# Altium PCB PCB_URC-VPN-New-Project_5_2025-07-22.pcbdoc
Units mm, origin at the board's own origin, x right, y up, seen from the top; angles counter-clockwise.
Board outline 95.38 x 82.5 mm, 2 copper layers (Top Layer, Bottom Layer); 26 components, 18 nets, 72 pads, 14 vias.
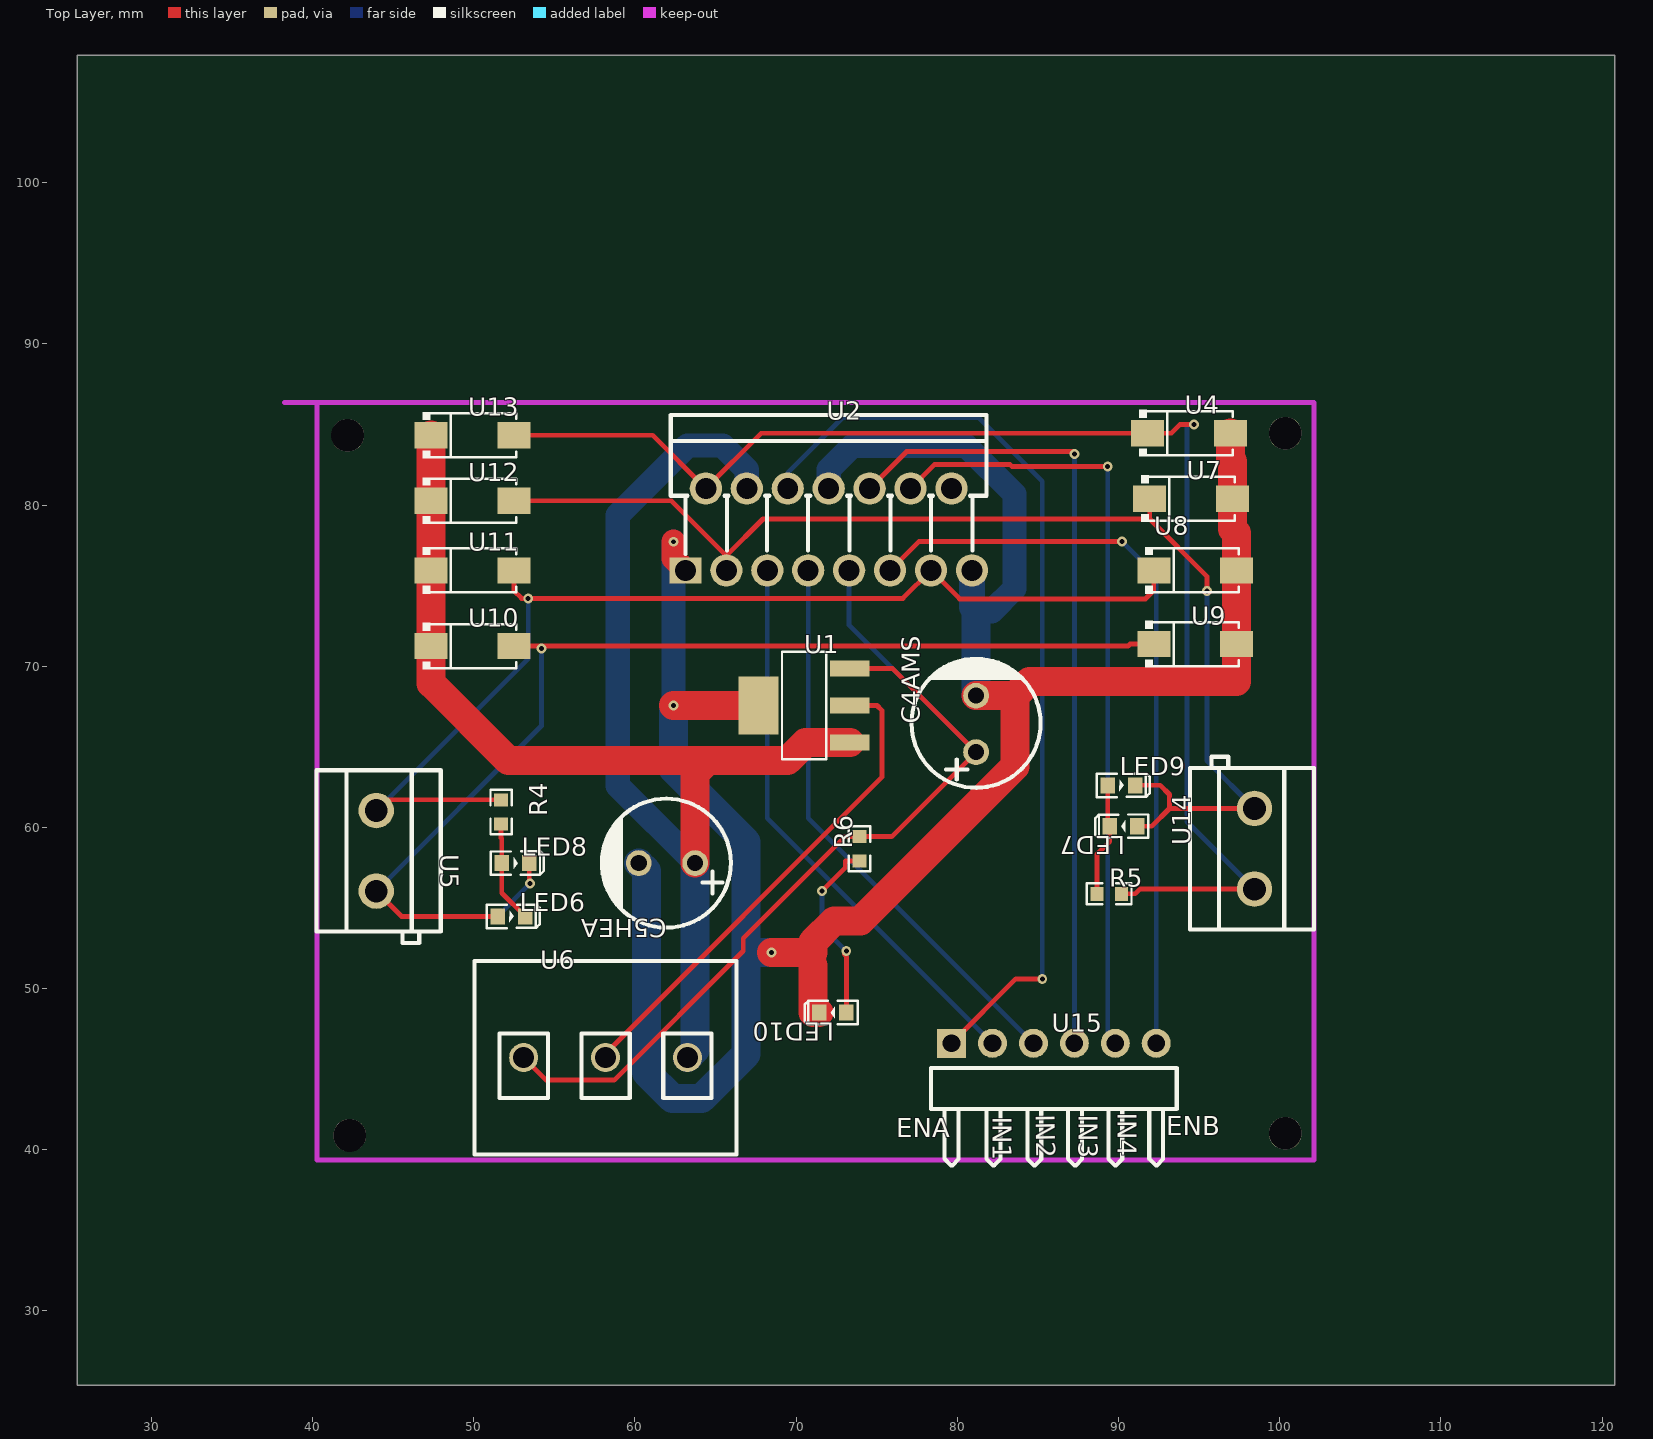
[diagram p0: Top Layer view]
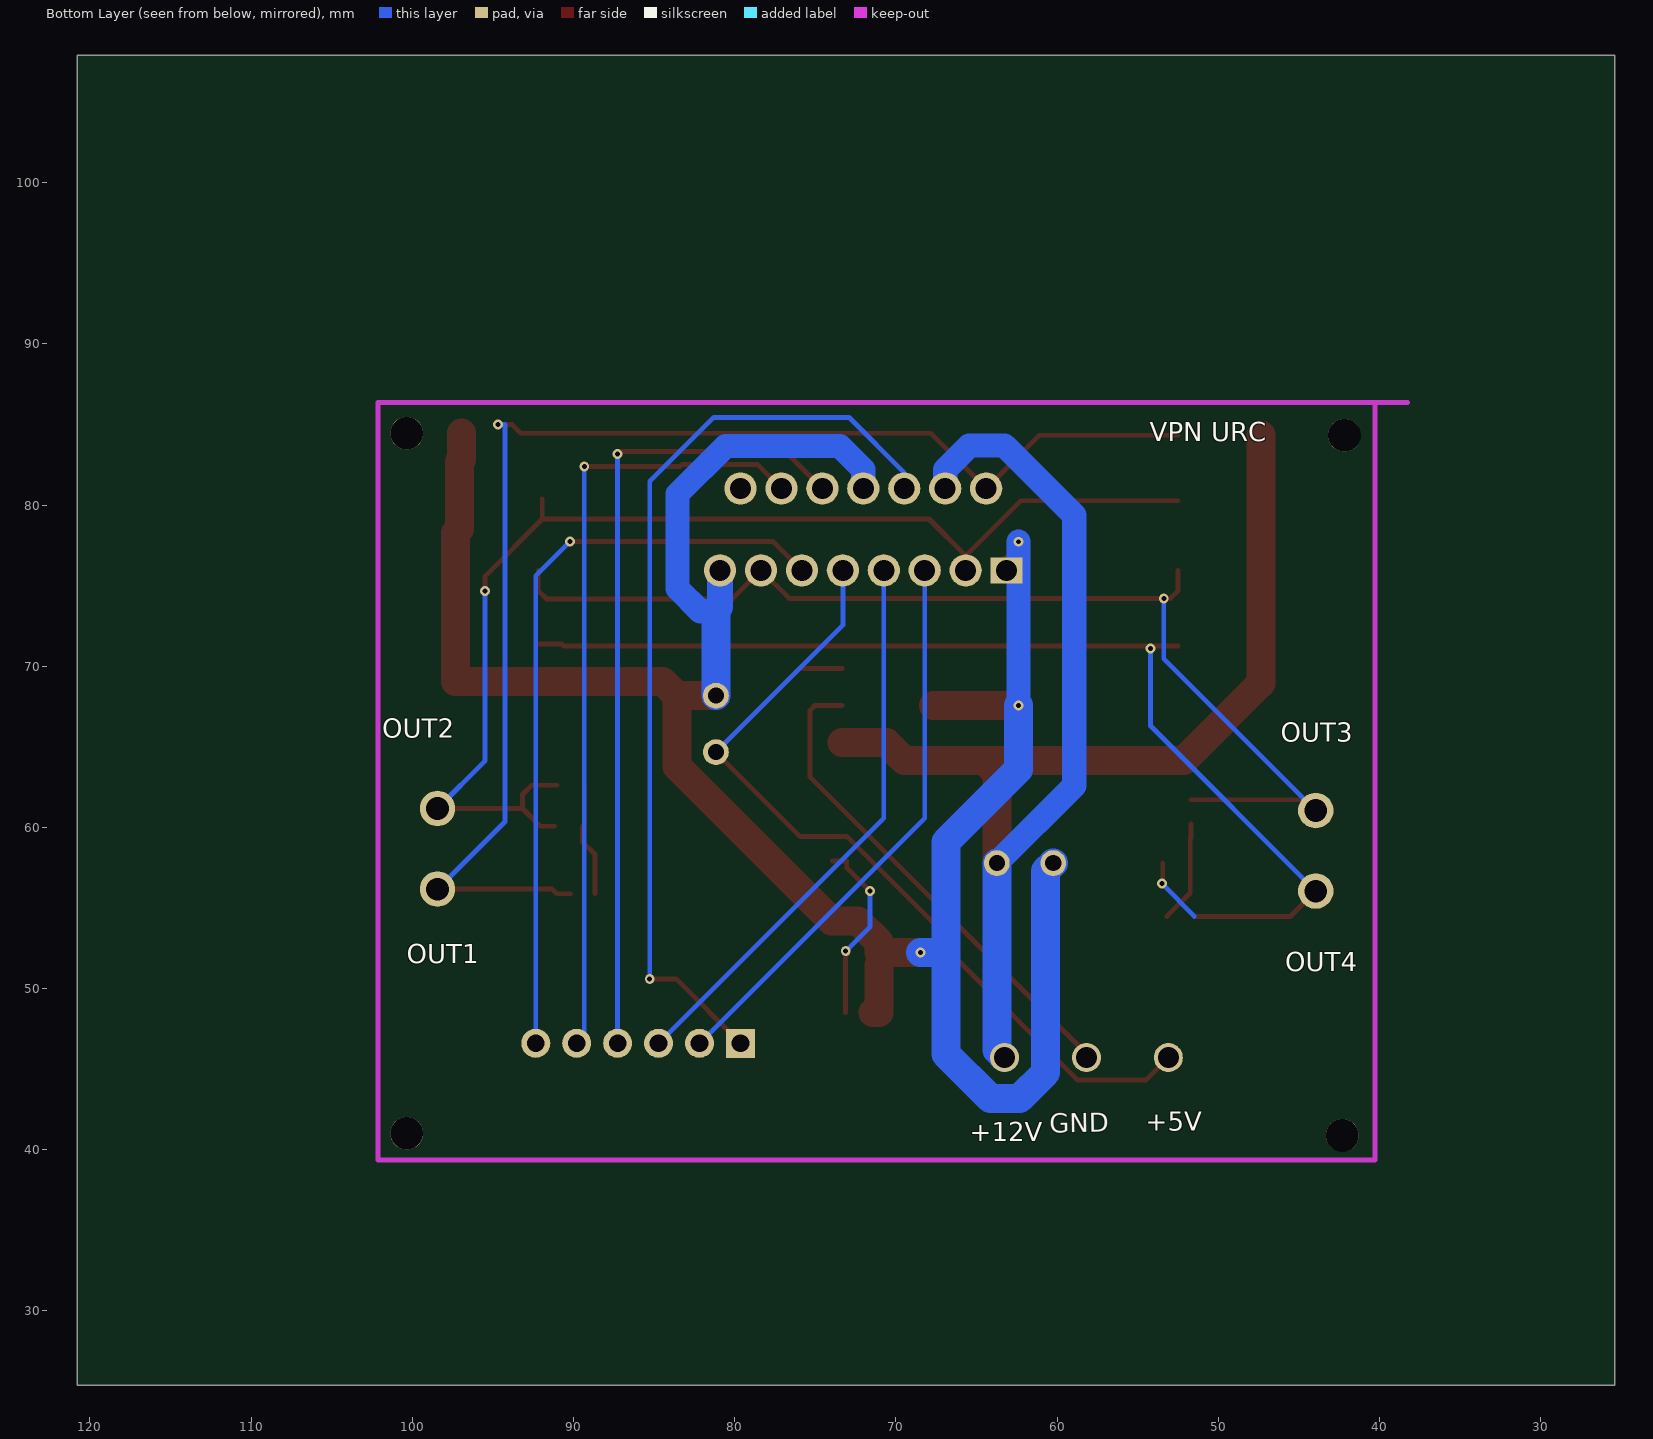
[diagram p1: Bottom Layer view, seen from below]

## Layer stack, top to bottom
Top Layer: signal copper (thickness not stored)
Dielectric: dielectric 0.32, FR-4, Dk 4.8
Bottom Layer: signal copper (thickness not stored)

## Board outline
120.781,25.4 25.4,25.4 25.4,107.902 120.781,107.902

## Components (designator, comment, footprint, x,y, rotation, side; value= is the part's Value field where it differs from the comment)
C4AMS "220uF" CAP-TH_BD8.0-P3.50-D0.6-FD 81.161,66.421 r90 top
C5HEA "220uF" CAP-TH_BD8.0-P3.50-D0.6-FD 61.984,57.785 r180 top
LED6 "LED-0603_B" LED0603_BLUE 52.332,54.483 r0 top
LED7 "LED-0603_B" LED0603_BLUE 90.305,60.071 r180 top
LED8 "LED-0603_G" LED0603_GREEN 52.586,57.785 r0 top
LED9 "LED-0603_G" LED0603_GREEN 90.178,62.611 r0 top
LED10 "LED-0603_R" LED0603_RED 72.271,48.514 r180 top
R4 "1k" R0603 51.697,60.96 r90 top
R5 "1k" R0603 89.416,55.88 r0 top
R6 "1k" R0603 73.922,58.674 r90 top
U1 "LM78M05MP/TR" SOT-223-4_L6.5-W3.5-P2.30-LS7.0-BR 70.493,67.564 r0 top
U2 "L298N(MS)" MULTIWATT-15_L19.6-W5.0-P1.27-L 72.017,78.486 r0 top
U4 "1N4007 M7_C20754788" SMA_L4.4-W2.8-LS5.4-RD 94.369,84.455 r0 top
U5 "KF301-5.0-2P" CONN-TH_P5.00_KF301-5.0-2P 43.95,58.547 r270 top
U6 "1869224" CONN-TH_3P-P5.08_1869224 58.174,45.72 r0 top
U7 "1N4007 M7_C20754788" SMA_L4.4-W2.8-LS5.4-RD 94.496,80.391 r0 top
U8 "1N4007 M7_C20754788" SMA_L4.4-W2.8-LS5.4-RD 94.75,75.946 r0 top
U9 "1N4007 M7_C20754788" SMA_L4.4-W2.8-LS5.4-RD 94.75,71.374 r0 top
U10 "1N4007 M7_C20754788" SMA_L4.4-W2.8-LS5.4-RD 49.919,71.247 r0 top
U11 "1N4007 M7_C20754788" SMA_L4.4-W2.8-LS5.4-RD 49.919,75.946 r0 top
U12 "1N4007 M7_C20754788" SMA_L4.4-W2.8-LS5.4-RD 49.919,80.264 r0 top
U13 "1N4007 M7_C20754788" SMA_L4.4-W2.8-LS5.4-RD 49.919,84.328 r0 top
U14 "KF301-5.0-2P" CONN-TH_P5.00_KF301-5.0-2P 98.433,58.674 r90 top
U15 "1110-1X6(L11.5)PA6T" HDR-TH_6P-P2.54-H-M-W8.0 85.987,46.609 r0 top
? "" ? 71.191,89.866 r0 top
? "" ? 105.01,62.738 r0 top

## Footprints (in the part's own frame and the unit in brackets; to place one, negate y for a bottom-side part, rotate by r counter-clockwise, add the part's x,y. Pads: shape width x height; smd on the part's side, far side on the other; paste and mask are expansions set on the pad)
CAP-TH_BD8.0-P3.50-D0.6-FD [mm]
  round 1.6 hole 1 paste+0 mask+0.051: 1(-1.75,0) 2(1.75,0)
  silkscreen extent -3.96,-4 4.04,4
CONN-TH_3P-P5.08_1869224 [mm]
  round 1.8 hole 1.3 paste+0 mask+0.05: 1(-5.08,0) 2(0,0) 3(5.08,0)
  silkscreen extent -8.13,-6 8.12,6
CONN-TH_P5.00_KF301-5.0-2P [mm]
  round 2.2 hole 1.4 paste+0 mask+0.051: 1(-2.5,0) 2(2.5,0)
  silkscreen extent -5,-3.7 5.71,4
HDR-TH_6P-P2.54-H-M-W8.0 [mm]
  rect 1.8x1.8 hole 1.1 paste+0 mask+0.051: 1(-6.35,0)
  round 1.8 hole 1.1 paste+0 mask+0.051: 2(-3.81,0) 3(-1.27,0) 4(1.27,0) 5(3.81,0) 6(6.35,0)
  silkscreen extent -7.62,-7.57 7.62,-1.53
LED0603_BLUE [mm]
  rect 0.9x1 smd paste+0 mask+0.051: 1(-0.85,0) 2(0.85,0)
  silkscreen extent -1.54,-0.73 1.75,0.73
LED0603_GREEN [mm]
  rect 0.9x1 smd paste+0 mask+0.051: 1(-0.85,0) 2(0.85,0)
  silkscreen extent -1.54,-0.73 1.75,0.73
LED0603_RED [mm]
  rect 0.9x1 smd paste+0 mask+0.051: 1(-0.85,0) 2(0.85,0)
  silkscreen extent -1.54,-0.73 1.75,0.73
MULTIWATT-15_L19.6-W5.0-P1.27-L [mm]
  rect 2x1.6 hole 1.3 paste+0 mask+0.051: 1(-8.89,-2.54)
  round 2 hole 1.3 paste+0 mask+0.051: 2(-7.62,2.54) 3(-6.35,-2.54) 4(-5.08,2.54) 5(-3.81,-2.54) 6(-2.54,2.54) 7(-1.27,-2.54) 8(0,2.54) 9(1.27,-2.54) 10(2.54,2.54) 11(3.81,-2.54) 12(5.08,2.54) 13(6.35,-2.54) 14(7.62,2.54) 15(8.89,-2.54)
  silkscreen extent -9.8,-1.52 9.8,7.09
R0603 [mm]
  rect 0.806x0.864 smd paste-100 mask+0.051: 1(-0.753,0) 2(0.753,0)
  silkscreen extent -1.39,-0.66 1.39,0.66
SMA_L4.4-W2.8-LS5.4-RD [mm]
  rect 2.046x1.62 smd paste+0 mask+0.051: 1(-2.566,0) 2(2.565,0)
  silkscreen extent -3.08,-1.44 2.7,1.44
SOT-223-4_L6.5-W3.5-P2.30-LS7.0-BR [mm]
  rect 2.47x0.98 smd paste+0 mask+0.051: 1(2.835,-2.3) 2(2.835,0) 3(2.835,2.3)
  rect 2.47x3.6 smd paste+0 mask+0.051: 4(-2.835,0)
  silkscreen extent -1.37,-3.33 1.37,3.33
? [mm]

## Free pads (board coordinates)
  round 2.032 hole 2.032 unplated paste+0: ""(42.172,84.328) ""(42.299,40.894) ""(100.338,41.021) ""(100.338,84.455)

## Via types
v1: diameter 0.61, hole 0.305, Top Layer to Bottom Layer, tented both sides, 13 vias
v2: diameter 0.62, hole 0.31, Top Layer to Bottom Layer, tented both sides, 1 vias

## Nets (pads, with @x,y where several pads share a name; then routed paths per layer and width w, separated by ;. In a path a pad name is that pad's centre, name@x,y a point inside that pad or via, vN(x,y) a via of type N, cw(c..) or ccw(c..) an arc to the next point about the centre after c; other vN are vias at no path point)
5V: C4AMS.1 R6.2 U1.3 U2.9 U6.1 | length 62.1
  Top Layer w0.3: U6.1 54.488,44.326 58.712,44.326 66.716,52.332 66.716,53.119 73.025,59.428 R6.2 ; U1.3 75.968,69.864 C4AMS.1 75.917,59.427 R6.2
  Bottom Layer w0.3: U2.9 73.287,72.545 C4AMS.1
12V: C5HEA.1 U1.1 U2.4 U6.3 U10.1 U11.1 U12.1 U13.1 | length 97.9
  Top Layer w1.8: U13.1 U12.1 U11.1 U10.1 47.353,68.937 52.155,64.136 64.496,64.136 ; C5HEA.1 63.734,63.373 64.496,64.136 ; U1.1 70.593,65.264 69.464,64.136 64.496,64.136
  Bottom Layer w1.5: C5HEA.1 58.936,62.583 58.936,79.37 63.249,83.683 65.446,83.683 66.937,82.192 U2.4
  Bottom Layer w1.8: U6.3 63.734,46.2 C5HEA.1
GND: C4AMS.2 C5HEA.2 LED10.2 U1.4 U2.1 U2.8 U2.15 U4.2 U7.2 U8.2 U9.2 | length 155
  Top Layer w1.5: v1(62.385,77.723) 62.385,76.688 U2.1
  Top Layer w1.8: v1(62.385,67.564) U1.4 ; v1(68.465,52.236) 71.043,52.236 71.043,52.888 72.361,54.206 73.991,54.206 83.576,63.79 83.576,68.171 ; 71.044,51.432 71.044,48.514 LED10.2 ; C4AMS.2 83.576,68.171 ; U4.2 96.934,82.828 97.061,82.701 U7.2 97.061,78.51 97.315,78.256 U8.2 U9.2 97.315,69.064 84.469,69.064 83.576,68.171
  Bottom Layer w1.5: v1(62.385,67.564) v1(62.385,77.723) ; U2.8 72.017,82.206 73.477,83.667 80.554,83.667 83.54,80.681 83.54,74.818 82.127,73.406 81.161,73.406
  Bottom Layer w1.6: U2.15 80.907,73.66 81.161,73.406
  Bottom Layer w1.8: C5HEA.2 60.714,57.305 60.714,44.789 62.322,43.181 64.13,43.181 66.896,45.947 66.896,52.236 v1(68.465,52.236) ; v1(62.385,67.564) 62.385,63.607 66.896,59.096 66.896,52.238 ; C4AMS.2 81.161,73.406
LED6_2: LED6.2 LED8.1 R4.1 | length 6.3
  Top Layer w0.3: R4.1 51.697,59.353 51.736,59.314 LED8.1 51.736,55.929 LED6.2
LED7_2: LED7.2 LED9.1 R5.1 | length 7.1
  Top Layer w0.3: R5.1@88.662,55.88 88.662,58.328 89.455,59.121 LED7.2 89.328,60.198 LED9.1
R6_1: LED10.1 R6.1 | length 11.6
  Top Layer w0.3: v1(71.598,56.047) 73.039,57.489 73.039,57.921 R6.1 ; v1(73.109,52.324) 73.109,52.247 72.994,52.132 73.121,52.004 LED10.1
  Bottom Layer w0.3: v1(71.598,56.047) 71.598,53.835 v1(73.109,52.324)
U1_2: U1.2 U6.2 | length 30.8
  Top Layer w0.3: U6.2 58.174,45.974 75.314,63.114 75.314,67.264 75.014,67.564 U1.2
U2_2: R5.2 U2.2 U4.1 U13.2 U14.1 | length 84.6
  Top Layer w0.3: U13.2 61.095,84.328 U2.2 67.826,84.455 U4.1 93.277,84.455 93.821,84.999 v1(94.688,84.999) ; R5.2 91.023,55.88 91.317,56.174 U14.1
  Bottom Layer w0.3: v1@94.686,84.999 94.242,84.999 94.242,60.366 U14.1
U2_3: LED7.1 LED9.2 U2.3 U7.1 U12.2 U14.2 | length 75.6
  Top Layer w0.3: U12.2 62.257,80.264 U2.3@65.667,76.855 ; U2.3 U2.3@65.667,76.855 ; LED9.2 92.591,62.611 93.16,62.042 93.16,61.173 ; LED7.1 92.056,60.071 93.159,61.174 U14.2 ; U7.1 91.93,79.13 ; v1(95.476,74.662) 95.476,75.585 91.93,79.13 ; U2.3@65.667,76.855 67.943,79.13 91.93,79.13
  Bottom Layer w0.3: v1(95.476,74.662) 95.476,64.131 U14.2
U2_5: U2.5 U15.2 | length 35.1
  Bottom Layer w0.3: U2.5 68.207,60.579 U15.2
U2_6: U2.6 U15.1 | length 58
  Top Layer w0.3: U15.1 83.63,50.603 v1(85.269,50.603)
  Bottom Layer w0.3: U2.6 69.477,82.004 72.906,85.433 81.299,85.433 85.269,81.463 v1(85.269,50.603)
U2_7: U2.7 U15.3 | length 35.1
  Bottom Layer w0.3: U2.7 70.747,60.579 U15.3
U2_10: U2.10 U15.4 | length 50.3
  Top Layer w0.3: U2.10 76.843,83.312 87.257,83.312 v1@87.257,83.157
  Bottom Layer w0.3: U15.4 v1(87.257,83.156)
U2_11: U2.11 U15.6 | length 47.1
  Top Layer w0.3: U2.11 77.611,77.73 v1(90.221,77.73)
  Bottom Layer w0.3: v1(90.221,77.73) 92.337,75.614 U15.6
U2_12: U2.12 U15.5 | length 48.9
  Top Layer w0.3: U2.12 78.577,82.507 83.275,82.507 83.383,82.399 v1(89.326,82.399)
  Bottom Layer w0.3: v1(89.326,82.399) 89.326,47.08 U15.5
U2_13: R4.2 U2.13 U5.1 U8.1 U11.2 | length 69.2
  Top Layer w0.3: U5.1 44.616,61.713 R4.2 ; U11.2 52.484,74.685 52.966,74.204 v1(53.376,74.204) 76.624,74.204 U2.13 80.14,74.173 91.672,74.173 92.184,74.685 U8.1
  Bottom Layer w0.3: U5.1 53.376,70.472 v1(53.376,74.204)
U2_14: U2.14
U9_1: LED6.1 LED8.2 U5.2 U9.1 U10.2 | length 71.7
  Top Layer w0.3: U5.2 45.514,54.483 LED6.1 ; U10.2 v1@53.958,71.247 ; LED8.2 53.436,56.554 v2(53.475,56.515) ; v1(54.193,71.094) 54.111,71.094 v1@53.958,71.247 ; U9.1 90.71,71.374 90.583,71.247 v1@53.958,71.247
  Bottom Layer w0.3: U5.2 54.193,66.29 v1(54.193,71.094) ; 51.482,54.483 v2(53.475,56.515)

## Silkscreen, mask and mechanical layers (free items; w line width, h text height)
Top Overlay:
  text "IN4" at 89.543,42.291 h2.03 r270
  text "IN2" at 84.463,42.164 h2.03 r271
  text "IN3" at 87.13,42.164 h2.03 r270
  text "IN1" at 81.796,42.037 h2.03 r270
  text "ENB" at 92.972,40.513 h2.03
  text "ENA" at 76.208,40.386 h2.03
Bottom Overlay:
  text "VPN URC" at 54.237,83.566 h2.03
  text "OUT2" at 101.862,65.151 h2.03
  text "OUT3" at 46.109,64.897 h2.03
  text "OUT1" at 100.338,51.181 h2.03
  text "OUT4" at 45.855,50.673 h2.03
  text "+5V" at 54.491,40.767 h2.03
  text "GND" at 60.46,40.64 h2.03 r359
  text "+12V" at 65.413,40.132 h2.03